# EAGLE board InterfacingBoardV1 (EAGLE 9.6.2)
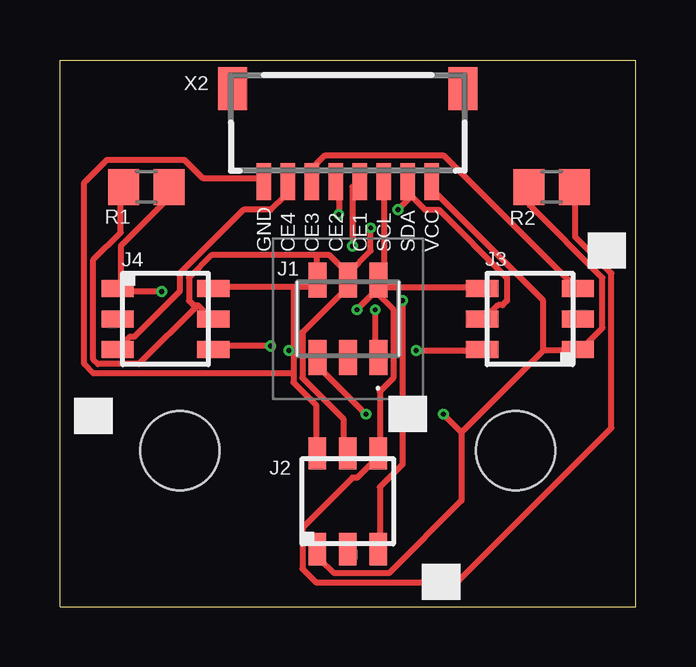
[diagram p0: board, top side]
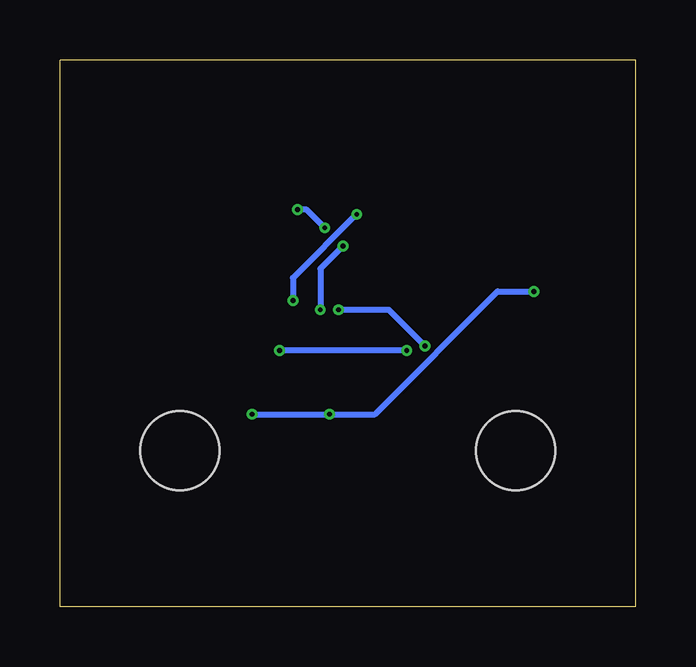
[diagram p1: board, bottom side, seen from below]

Size 24 x 22.8 mm. Coordinates in mm from the lower left corner, seen from the top.
Outline: 0,0 0,22.8 24,22.8 24,0 0,0
Copper layers (1*16): Top 0.035mm / dielectric 1.5mm / Bottom 0.035mm
Design rules "PCB-POOL HighSpec *": minimum track width 10mil, minimum drill 0.2mm, track to track 0.125mm, track to pad 0.125mm, pad to pad 0.125mm, via to via 0.125mm, smd to smd 0.125mm, copper to edge 0.3mm, drill to drill 0.2mm, minimum pad ring 0.2mm, minimum via ring 0.125mm, stop-mask expansion 0.03mm, vias tented up to drill 0mil, thermal gap 0.2mm
Holes 3.3 mm at 5,6.5 19,6.5

## Footprints (pad centres in the part's own frame; a part is rotated, then mirrored left to right if it is on the bottom)
CLP10302FDBE = smd 0.74 x 1.47: 1 1.27,-1.615; 2 1.27,1.615; 3 0,-1.615; 4 0,1.615; 5 -1.27,-1.615; 6 -1.27,1.615
CLP-103-02-F-DH = smd 0.711 x 1.346: 1 1.27,-1.994; 2 1.27,1.994; 3 0,-1.994; 4 0,1.994; 5 -1.27,-1.994; 6 -1.27,1.994
R0805 = smd 1.3 x 1.5: 1 -0.95,0; 2 0.95,0
SM08B-SRSS-TB = smd 0.6 x 1.55: 1 -3.5,2.975; 2 -2.5,2.975; 3 -1.5,2.975; 4 -0.5,2.975; 5 0.5,2.975; 6 1.5,2.975; 7 2.5,2.975; 8 3.5,2.975 | smd 1.2 x 1.8: FIT@1 -4.8,-0.9; FIT@2 4.8,-0.9

## Placement (x,y rotation side)
J1  CLP-103-02-F-D-BE  [CLP10302FDBE]  12.01,12.01 0 top
J2  CLP-103-02-F-DH  [CLP-103-02-F-DH]  12,4.4 0 top
J3  CLP-103-02-F-DH  [CLP-103-02-F-DH]  19.6,12 90 top
J4  CLP-103-02-F-DH  [CLP-103-02-F-DH]  4.4,12 270 top
R1  10k  [R0805]  3.6,17.5 0 top
R2  10k  [R0805]  20.5,17.5 180 top
X2  SM08B-SRSS-TB  [SM08B-SRSS-TB]  12,20.7 180 top

## Library data of the parts
J1 = SamacSys_Parts; DESCRIPTION: Board to Board & Mezzanine Connectors .050" Tiger Claw Rugged Reliable Dual Wipe Socket Strip; HEIGHT: 2.37mm; MANUFACTURER_NAME: SAMTEC; MANUFACTURER_PART_NUMBER: CLP-103-02-F-D-BE; MOUSER_PART_NUMBER: 200-CLP10302FDBE; MOUSER_PRICE-STOCK: https://www.mouser.com/Search/Refine.aspx?Keyword=200-CLP10302FDBE; RS_PART_NUMBER: 1801984P; RS_PRICE-STOCK: http://uk.rs-online.com/web/p/products/1801984P
J2-J4 = con-samtec2
R1 R2 = rcl; SPICEPREFIX: R
X2 = con-jst2

## Nets
GND: J1.6 J2.6 J3.6 J4.6 X2.8
GPIO0/CE_1: J1.1 X2.4
GPIO0/CE_2: J2.1 X2.5
GPIO0/CE_3: J3.1 X2.6
GPIO0/CE_4: J4.1 X2.7
SCL: J1.2 J2.2 J3.2 J4.2 R2.1 X2.3
SDA: J1.4 J2.4 J3.4 J4.4 R1.1 X2.2
VCC: J1.5 J2.5 J3.5 J4.5 R1.2 R2.2 X2.1

## Tracks (layer width: path | path; a pad name or v marks a point on that pad's centre or on a via)
GND  (via drill 0.2)
  Top 0.254: 9.73,13.33 10.49,13.33 10.68,13.52 J1.6 | 9.73,13.33 6.51,13.33 J4.6 | 9.73,13.33 9.73,10.68 | 9.73,10.68 9.73,9.73 | 9.73,9.73 9.73,9.35 10.68,8.41 10.68,6.51 J2.6 | v14.85,10.68 17.5,10.68 J3.6 | 9.73,10.68 v9.54,10.68 | 9.73,9.73 1.4,9.73 1.02,10.11 1.02,17.69 1.96,18.64 5.19,18.64 5.94,17.88 8.41,17.88 X2.8
  Bottom 0.254: v9.54,10.68 v14.85,10.68
GPIO0/CE_1  (via drill 0.2)
  Top 0.254: v13.14,12.39 13.14,10.49 J1.1 | v12.2,15.04 12.2,17.5 12.39,17.69 X2.4
  Bottom 0.254: v13.14,12.39 13.14,14.09 v12.2,15.04
GPIO0/CE_2  (via drill 0.2)
  Top 0.254: v14.28,12.77 14.28,5.94 13.33,5 13.33,2.53 J2.1 | v11.63,16.37 11.63,17.69 X2.5
  Bottom 0.254: v14.28,12.77 14.28,13.71 v11.63,16.37
GPIO0/CE_3
  Top 0.254: J3.1 21.48,13.33 15.99,18.83 11.06,18.83 10.68,18.45 10.68,17.88 X2.6
GPIO0/CE_4
  Top 0.254: J4.1 2.53,10.87 2.91,11.25 3.1,11.25 5,13.14 5,13.9 7.65,16.55 8.79,16.55 9.35,17.12 9.35,17.69 X2.7
N$1
  Top 0.254: 10.7,14.6 10.7,13.9
SCL  (via drill 0.2)
  Top 0.254: v8.79,10.87 6.51,10.87 J4.2 | 13.14,13.14 v12.39,12.39 | 13.14,13.33 13.14,13.52 J1.2 | 13.14,13.33 13.14,13.14 | 13.14,13.14 13.9,12.39 13.9,9.54 13.33,8.97 13.33,6.51 J2.2 13.33,6.32 12.39,5.38 12.2,5.38 10.11,3.29 10.11,1.58 10.68,1.02 16.55,1.02 23,7.46 23,13.9 21.48,15.42 21.48,17.31 R2.1 | 13.14,13.14 J1.2 | 13.14,13.33 17.5,13.33 J3.2 | 13.14,13.33 J1.2 | X2.3 13.52,17.69 13.52,13.9 13.33,13.71 J1.2
  Bottom 0.254: v8.79,10.87 10.3,12.39 v12.39,12.39
SDA  (via drill 0.2)
  Top 0.254: 14.66,17.12 15.23,16.55 15.8,16.55 18.64,13.71 18.64,12.77 18.45,12.58 18.26,12.58 17.69,12.01 J3.4 | 14.66,17.12 14.66,17.69 X2.2 14.66,17.12 | J2.4 11.82,6.51 11.82,7.84 10.11,9.54 10.11,11.44 12.2,13.52 J1.4 | 5.75,12.58 6.32,12.01 J4.4 | 5.75,12.58 5.56,12.58 5.38,12.77 5.38,13.71 6.32,14.66 10.7,14.66 11.25,14.66 12.01,13.9 | 12.01,13.9 12.2,13.71 J1.4 | 5.75,12.58 3.29,10.11 1.58,10.11 1.4,10.3 1.4,14.47 2.53,15.61 2.53,17.31 R1.1 | v14.09,16.55 14.66,17.12 | v12.96,15.8 12.96,14.85 12.01,13.9 | 12.01,13.9 J1.4
  Bottom 0.254: v14.09,16.55 13.71,16.55 v12.96,15.8
VCC  (via drill 0.2)
  Top 0.254: R1.2 4.43,17.31 4.43,16.94 2.53,15.04 2.53,13.33 J4.5 2.53,13.14 v4.24,13.14 | 16.74,7.27 16.74,4.43 13.71,1.4 11.44,1.4 10.87,1.96 10.87,2.34 J2.5 | 20.16,10.68 16.74,7.27 | 20.16,10.68 21.48,10.68 J3.5 21.67,10.68 22.62,11.63 22.62,13.71 19.59,16.74 19.59,17.31 R2.2 | v12.77,8.03 10.87,9.92 10.87,10.3 J1.5 | 16.74,7.27 v15.99,8.03 | 20.16,10.68 20.16,12.77 15.61,17.31 15.61,17.69 X2.1
  Bottom 0.254: v15.99,8.03 v12.77,8.03 10.87,8.03 5.75,13.14 v4.24,13.14

## Text on the board
tPlace: GND | CE4 | CE3 | CE2 | CE1 | SCL | SDA | VCC